# Altium PCB keyboard.PcbDoc
Units mm, origin at the board's own origin, x right, y up, seen from the top; angles counter-clockwise.
Board outline 80.01 x 69.34 mm, 2 copper layers (Top Layer, Bottom Layer); 38 components, 19 nets, 124 pads, 15 vias.
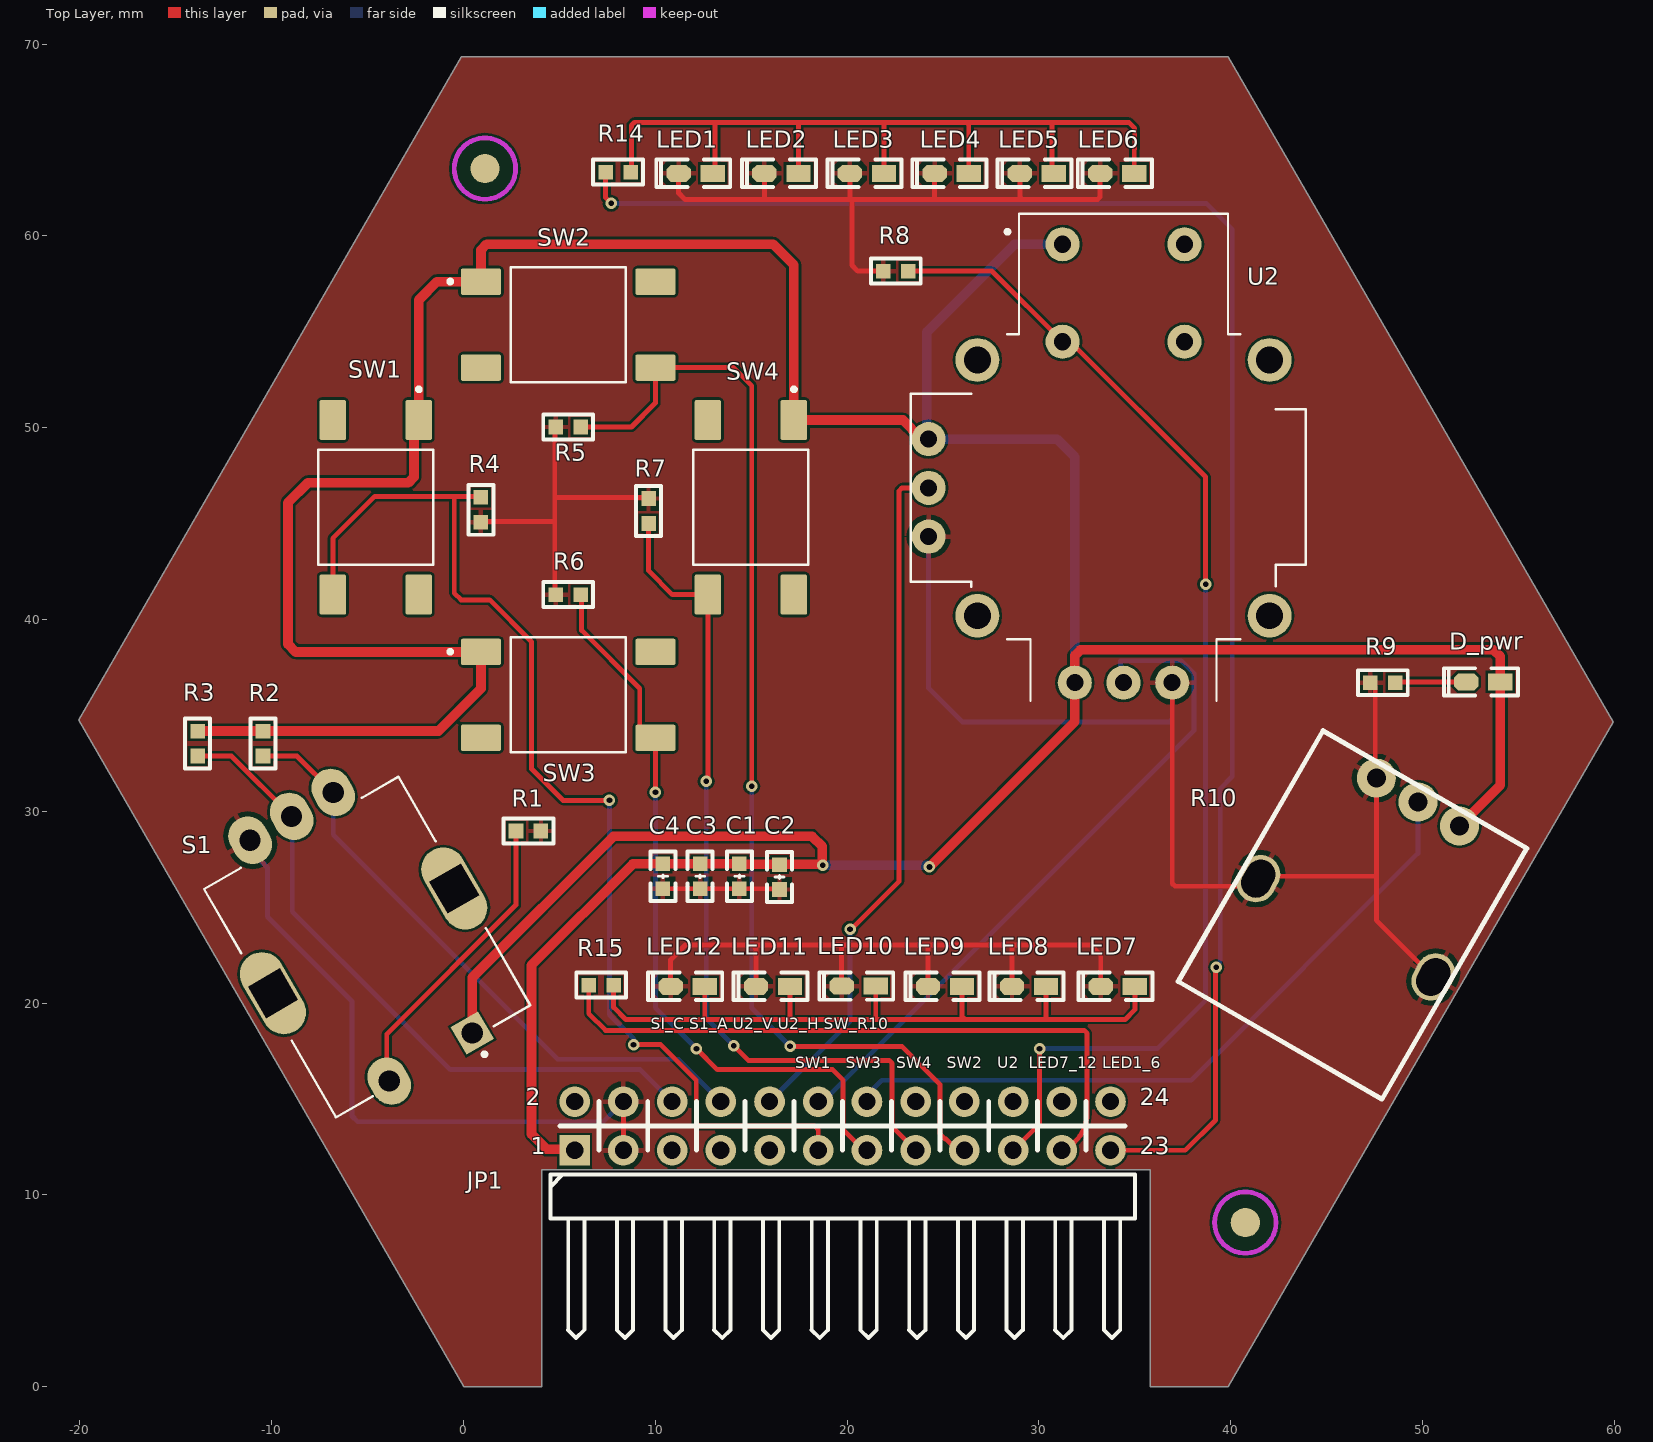
[diagram p0: Top Layer view]
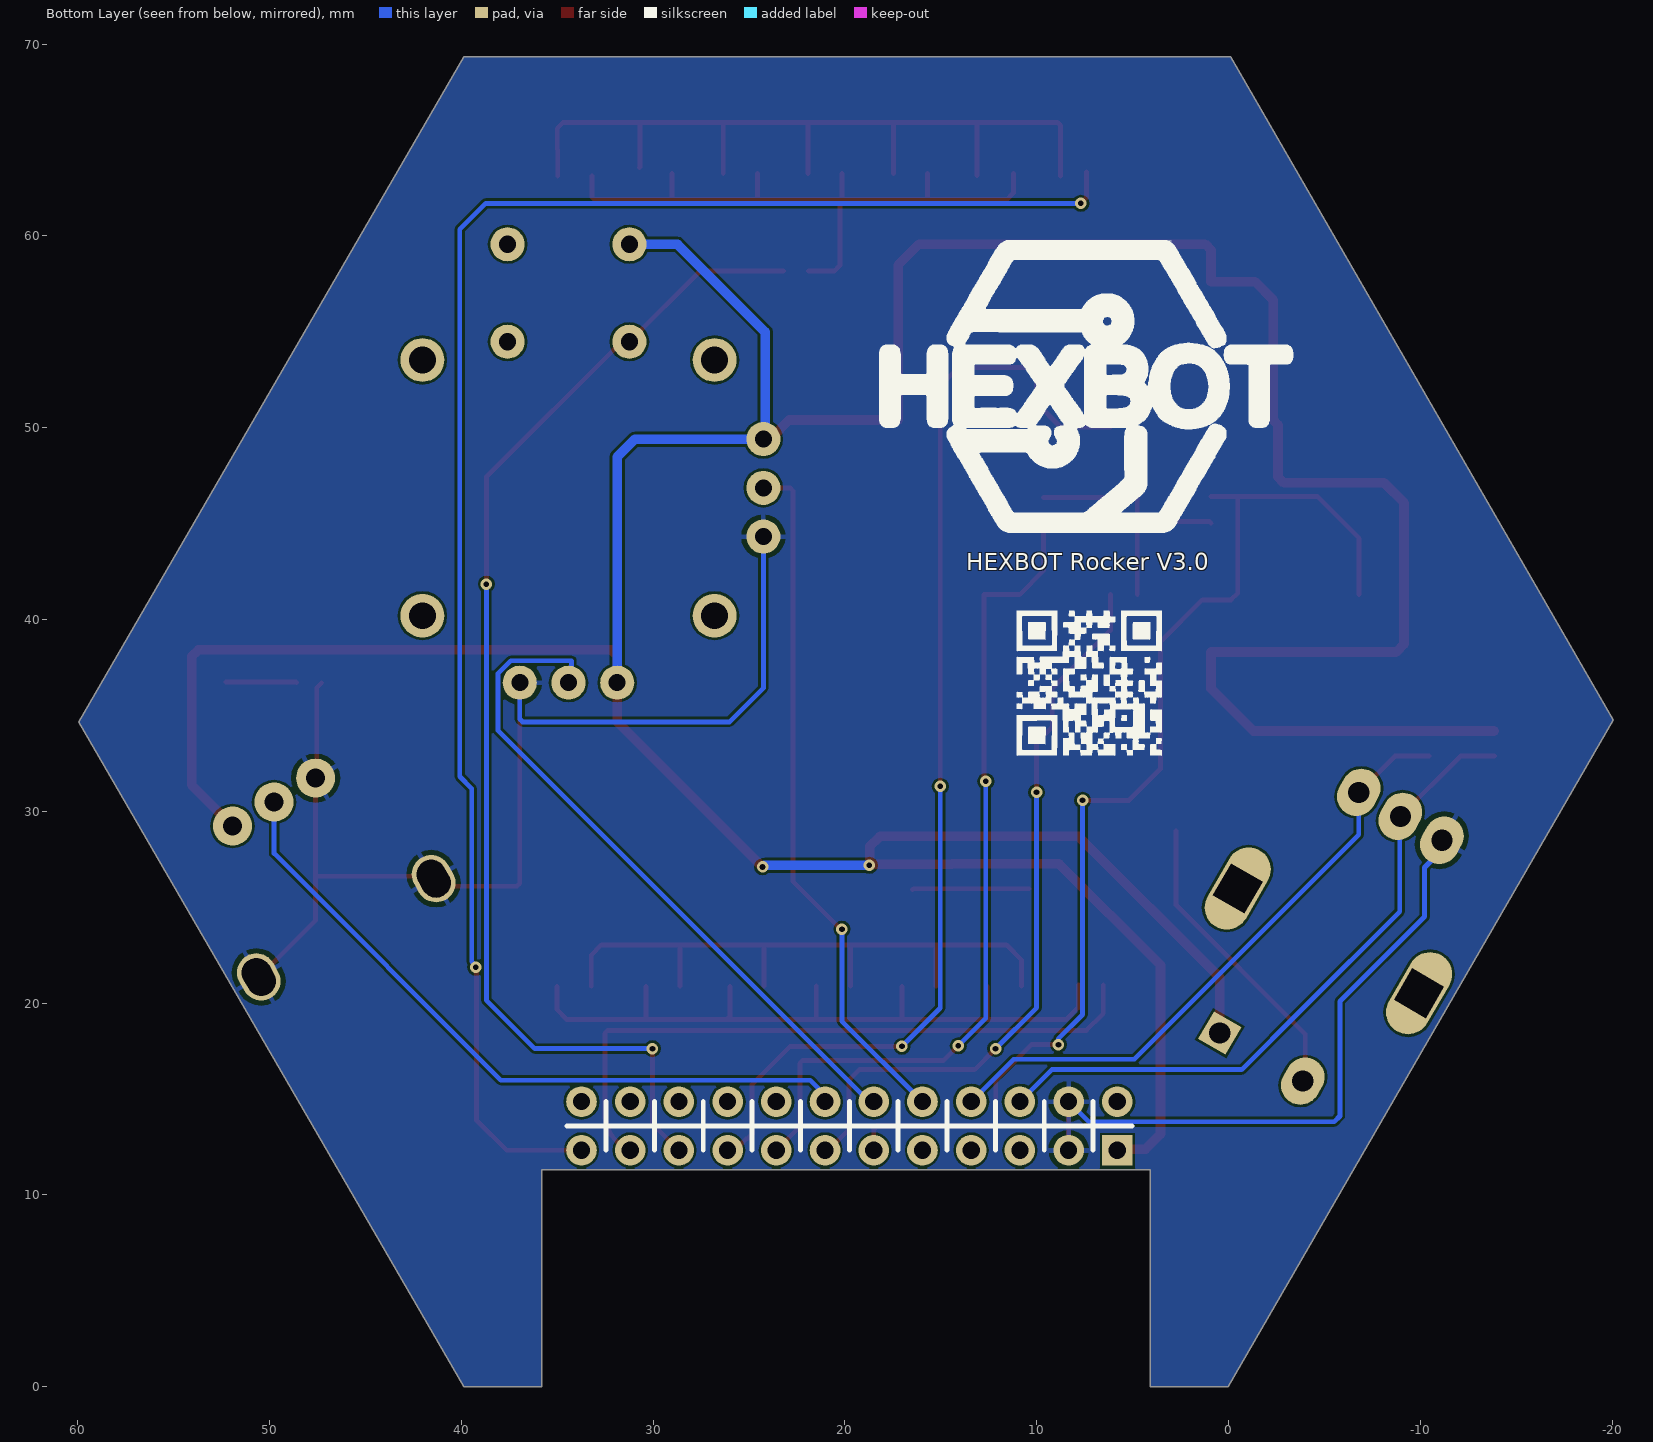
[diagram p1: Bottom Layer view, seen from below]

## Layer stack, top to bottom
Top Solder: solder mask 0.0102, Solder Resist, Dk 3.5
Top Layer: signal copper 0.0356
Dielectric 1: dielectric 0.32, FR-4, Dk 4.8
Bottom Layer: signal copper 0.0356
Bottom Solder: solder mask 0.0102, Solder Resist, Dk 3.5

## Board outline
-20.06,34.765 0.01,0 4.074,0 4.074,11.294 35.824,11.294 35.824,0 39.888,0 59.954,34.661 39.888,69.342 -0.11,69.342

## Design rules (kind name [scope] priority, off if disabled: settings)
Clearance [All] p1: gap=0.127 ignorepadtopadclearanceinfootprint=TRUE
HoleToHoleClearance [All] p1: gap=0 allowstackedmicrovias=TRUE
MinimumSolderMaskSliver [All] p1: minsoldermaskwidth=0
PolygonConnect [All] p1: connectstyle=Relief reliefconductorwidth=0.254 reliefentries=4 polygonreliefangle="90 Angle" airgapwidth=0.254
RoutingVias [All] p1: holewidth=0.711 width=1.27 viastyle="Through Hole" minholewidth=0.254 minwidth=0.508 maxholewidth=0.711 maxwidth=1.27
SilkToSilkClearance [All] p1: silktosilkclearance=0
SilkToSolderMaskClearance [IsPad] p1: minsilkscreentomaskgap=0 clearancetoexposedcopper=TRUE
SolderMaskExpansion [All] p1: expansion=0.102 istentingtop=FALSE
Width Width_1 [All] p1: maxlimit=0.508 minlimit=0.254 preferedwidth=0.254
Width vcc [InNet('3V3')] p2: maxlimit=0.508 minlimit=0.381 preferedwidth=0.508
26 further rules are at their usual default settings.

## Classes and differential pairs
component class keyboard: C1 C2 C3 C4 D_pwr JP1 LED1 LED2 LED3 LED4 LED5 LED6 LED7 LED8 LED9 LED10 LED11 LED12 R1 R2 R3 R4 R5 R6 R7 R8 R9 R10 R14 R15 S1 SW1 SW2 SW3 SW4 U2

## Components (designator, comment, footprint, x,y, rotation, side; value= is the part's Value field where it differs from the comment)
C1 "10uF" "C 0603_L" 14.39,26.61 r90 top
C2 "10uF" "C 0603_L" 16.48,26.57 r90 top
C3 "0.1uF" "C 0603_L" 12.34,26.61 r90 top
C4 "0.1uF" "C 0603_L" 10.4,26.61 r90 top
D_pwr "红色" "LED 0603R" 53.18,36.75 r180 top
JP1 "Header 2X11" HDR2.54-WI-2x12P 19.77,13.59 r0 top
LED1 "红色" "LED 0603R" 12.11,63.27 r180 top
LED2 "红色" "LED 0603R" 29.9,63.27 r180 top
LED3 "红色" "LED 0603R" 25.46,63.27 r180 top
LED4 "红色" "LED 0603R" 21.04,63.27 r180 top
LED5 "红色" "LED 0603R" 16.58,63.27 r180 top
LED6 "红色" "LED 0603R" 34.09,63.27 r180 top
LED7 "红色" "LED 0603R" 34.12,20.88 r180 top
LED8 "红色" "LED 0603R" 29.49,20.88 r180 top
LED9 "红色" "LED 0603R" 25.11,20.88 r180 top
LED10 "红色" "LED 0603R" 20.61,20.89 r180 top
LED11 "红色" "LED 0603R" 16.14,20.88 r180 top
LED12 "红色" "LED 0603R" 11.69,20.88 r180 top
MARK1 "Mark" Mark 1.12,63.51 r90 top
MARK2 "Mark" Mark 40.77,8.55 r90 top
R1 "1K" "R 0603_L" 3.39,28.97 r0 top
R2 "1K" "R 0603_L" -10.45,33.53 r270 top
R3 "1K" "R 0603_L" -13.86,33.53 r270 top
R4 "10k" "R 0603_L" 0.911,45.72 r90 top
R5 "10k" "R 0603_L" 5.461,50.038 r0 top
R6 "10k" "R 0603_L" 5.461,41.297 r0 top
R7 "10k" "R 0603_L" 9.652,45.655 r270 top
R8 "10k" "R 0603_L" 22.544,58.166 r0 top
R9 "1K" "R 0603_L" 47.941,36.703 r0 top
R10 "potentiometer" "PCBComponent_1 - duplicate" 49.77,30.48 r150 top
R14 "1K" "R 0603_L" 8.063,63.325 r180 top
R15 "1K" "R 0603_L" 7.18,20.935 r180 top
S1 "482020514001" SW_482020514001 -5.207,23.241 r210 top
SW1 "4-1437565-1" TE_FSM4JSMA -4.572,45.847 r270 top
SW2 "4-1437565-1" TE_FSM4JSMA 5.461,55.372 r0 top
SW3 "4-1437565-1" TE_FSM4JSMA 5.461,36.068 r0 top
SW4 "4-1437565-1" TE_FSM4JSMA 14.986,45.847 r270 top
U2 "COM-09032" XDCR_COM-09032 34.417,46.863 r0 top

## Footprints (in the part's own frame and the unit in brackets; to place one, negate y for a bottom-side part, rotate by r counter-clockwise, add the part's x,y. Pads: shape width x height; smd on the part's side, far side on the other; paste and mask are expansions set on the pad)
"C 0603_L" [mil] "无极性贴片电容                                       淘宝ID:黄晶宝石"
  rect 30x30 smd: 1(-25.59,0) 2(25.59,0)
  silkscreen extent -51,-26 51,26, body extent -31,-16 31,16, height 32
HDR2.54-WI-2x12P [mm] "双排弯脚排针，12x2脚  淘宝ID:黄晶宝石   店铺网址:https://shop463601444.taobao.com"
  rect 1.6x1.6 hole 0.9: 1(-13.97,-1.27)
  round 1.6 hole 0.9: 2(-13.97,1.27) 3(-11.43,-1.27) 4(-11.43,1.27) 5(-8.89,-1.27) 6(-8.89,1.27) 7(-6.35,-1.27) 8(-6.35,1.27) 9(-3.81,-1.27) 10(-3.81,1.27) 11(-1.27,-1.27) 12(-1.27,1.27) 13(1.27,-1.27) 14(1.27,1.27) 15(3.81,-1.27) 16(3.81,1.27) 17(6.35,-1.27) 18(6.35,1.27) 19(8.89,-1.27) 20(8.89,1.27) 21(11.43,-1.27) 22(11.43,1.27) 23(13.97,-1.27) 24(13.97,1.27)
  silkscreen extent -15.24,-11.06 15.24,1.27, body extent -15.24,-11.23 15.24,1.62, height 5.1
"LED 0603R" [mil] "红色0603LED                                           淘宝ID:黄晶宝石"
  rect 50x35 smd: 1(-35,0.26)
  oct 50x35 smd: 2(35,0.26)
  silkscreen extent -71,-28 81,28, body extent -31,-16 31,16, height 18
Mark [mil]
  round 60 smd mask+39.37: mark(0,0)
  Top Layer keep-out circle w10: c0,0 r62.99
"PCBComponent_1 - duplicate" [mil]
  round 80 hole 39.37: 1(-98.43,0) 2(0,0) 3(98.42,0)
  oval 80x100 hole 80 slot 60 at 0 deg: 4(-206.69,295.28) 4(205,300)
  silkscreen extent -241,-30 242,565
"R 0603_L" [mil] "1/10W贴片电阻                 淘宝ID:黄晶宝石"
  rect 30x30 smd: 1(-25.59,0) 2(25.59,0)
  silkscreen extent -51,-26 51,26, body extent -31,-16 32,16, height 16
SW_482020514001 [mm]
  rect 1.65x1.65 hole 1.1: 1(-2.5,7)
  oval 2.032x2.54 hole 1.1: 2(2.5,7) A(-2.5,-7.5) B(2.5,-7.5) C(0,-7.5)
  oval 2.3x4.6 hole 1.9 square: S1(5.461,0) S2(-5.461,0)
  silkscreen extent -5.85,-6.5 5.85,8.37
TE_FSM4JSMA [mm]
  rrect15% 2.1x1.38 smd: 1(-4.55,2.24) 2(4.55,2.24) 3(-4.55,-2.24) 4(4.55,-2.24)
  silkscreen extent -6.25,-3 3,3
XDCR_COM-09032 [mil]
  round 70 hole 35.43: B1A(-125,500) B1B(125,500) B2A(-125,300) B2B(125,300)
  round 70 hole 35: H1(-100,-400) H2(0,-400) H3(100,-400) V1(-400,100) V2(-400,0) V3(-400,-100)
  round 90 hole 55: S1(-300,262.5) S2(-300,-262.5) S3(300,-262.5) S4(300,262.5)
  silkscreen extent -437,-437 374,563

## Part data
C1 C2 C3 C4: library part C, "贴片电容", BOM名称=无极性贴片电容, 唯一出售店铺网址=https://shop463601444.taobao.com, 淘宝ID="封装库来自淘宝 ID：黄晶宝石", 联系售后，技术支持=https://shop463601444.taobao.com
D_pwr LED1 LED2 LED3 LED4 LED5 LED6 LED7 LED8 LED9 LED10 LED11 LED12: library part LED-SMD, "贴片LED", BOM名称=贴片LED, 学习资源=https://shop463601444.taobao.com, 版权归属="封装库来自淘宝 ID：黄晶宝石"
JP1: library part "Header 12X2", "12*2P接插件", BOM名称=12*2P接插件, 学习资源=https://shop463601444.taobao.com, 版权归属="封装库来自淘宝卖家 ID：黄晶宝石"
R1 R2 R3 R4 R5 R6 R7 R8 R9 R14 R15: library part R, "贴片电阻", BOM名称=贴片电阻, 封装库来自淘宝卖家 ID：黄晶宝石=其他店铺购入均为盗版，不享受售后技术支持服务，请立即申请退款, 版权归属="来自淘宝 ID：黄晶宝石", 联系售后=https://shop463601444.taobao.com
R10: library part R?
S1: "Rotary Encoder Mechanical 20 Quadrature _Incremental_ Vertical", Package=None, Availability=Unavailable, MF="Wurth Electronics", MP=482020514001, Price=None, SnapEDA_Link=https://www.snapeda.com/parts/482020514001/Wurth%20Electronics%20Inc./view-part/3661073/?ref=snap
SW1 SW2 SW3 SW4: library part FSM4JSMA, "Tactile Switch SPST-NO Top Actuated Surface Mount", Contact_Current_Rating="50 mA", Package=None, Availability=Unavailable, Configuration_Pole-Throw="Single Pole - Single Throw", EU_RoHS_Compliance=Compliant, MF="TE Connectivity", MP=FSM4JSMA, Price=None, SnapEDA_Link=https://www.snapeda.com/parts/FSM4JSMA/TE%20Connectivity%20ALCOSWITCH%20Switches/view-part/543632/?ref=snap, TE_purchase_URL=https://www.te.com/usa-en/product-4-1437565-1.html?te_bu=Cor&te_type=disp&te_campaign=seda_glo_cor-seda-global-disp-prtnr-fy19-seda-model-bom-cta_sma-317_1&elqCampaignId=32493
U2: "Joystick, 2 - Axis Analog _Resistive_ Output", Package="SparkFun Electronics", Availability=Unavailable, MF="SparkFun Electronics", MP=COM-09032, Price=None, SnapEDA_Link=https://www.snapeda.com/parts/COM-09032/SparkFun%20Electronics/view-part/888157/?ref=snap

## Via types
v1: diameter 0.6, hole 0.3, Top Layer to Bottom Layer, tented both sides, 15 vias

## Nets (pads, with @x,y where several pads share a name; then routed paths per layer and width w, separated by ;. In a path a pad name is that pad's centre, name@x,y a point inside that pad or via, vN(x,y) a via of type N, cw(c..) or ccw(c..) an arc to the next point about the centre after c; other vN are vias at no path point)
3V3: C1.2 C2.2 C3.2 C4.2 D_pwr.1 JP1.1 R2.1 R3.1 R10.1 S1.1 SW1.1 SW2.1 SW3.1 SW4.1 U2.B1A U2.H1 U2.V1 | length 229.8
  Top Layer w0.508: R3.1 R2.1 -1.307,34.18 0.911,36.398 SW3.1 -8.748,38.308 -9.15,38.71 -9.15,46.09 -8.11,47.13 -2.878,47.13 -2.58,47.428 -2.58,50.149 SW1.1 -2.332,56.668 -1.388,57.612 SW2.1 0.911,59.272 1.209,59.569 16.137,59.569 17.226,58.48 SW4.1 22.919,50.397 23.816,49.5 24.16,49.5 U2.V1 ; S1.1 0.458,21.334 7.814,28.69 18.182,28.69 18.712,28.16 18.712,27.187 18.705,27.18 18.645,27.24 14.41,27.24 C1.2 C3.2 C4.2 8.835,27.26 3.55,21.975 3.55,13.164 4.334,12.38 5.74,12.38 JP1.1 ; v1(24.298,27.099) 31.877,34.678 U2.H1 31.877,38.122 32.175,38.42 53.72,38.42 54.069,38.071 D_pwr.1 54.069,31.364 R10.1
  Bottom Layer w0.508: v1(18.73,27.18) 24.191,27.18 24.273,27.099 v1(24.298,27.099) ; U2.V1@24.16,49.5 24.16,55 28.723,59.563 U2.B1A ; U2.V1 30.957,49.403 31.877,48.483 U2.H1
5V: JP1.2
GND: C1.1 C2.1 C3.1 C4.1 JP1.3 JP1.4 LED1.2 LED2.2 LED3.2 LED4.2 LED5.2 LED6.2 LED7.2 LED8.2 LED9.2 LED10.2 LED11.2 LED12.2 R1.2 R4.1 R5.1 R6.1 R7.1 R8.1 R9.1 R10.3 R10.4 S1.B U2.H3 U2.V3 | length 188.7
  Top Layer w0.254: R4.1@0.911,45.02 1.001,45.11 4.761,45.11 ; R6.1@4.761,41.297 4.761,45.11 ; R5.1@4.761,50.038 4.761,46.355 ; JP1.3 JP1.4 ; R7.1@9.652,46.355 4.761,46.355 ; C4.1 C3.1 C1.1 16.44,25.96 C2.1 ; LED12.2 10.801,22.251 11.58,23.03 15.06,23.03 ; LED1.2@11.221,63.257 11.221,62.239 11.57,61.89 15.72,61.89 ; LED11.2 15.251,22.839 15.06,23.03 ; LED5.2 15.691,61.919 15.72,61.89 ; LED10.2 19.721,22.969 19.66,23.03 ; LED4.2 20.151,61.999 20.26,61.89 ; R8.1 20.564,58.166 20.26,58.47 20.26,61.89 ; LED9.2 24.221,22.964 24.287,23.03 ; LED3.2 24.571,61.941 24.52,61.89 ; LED8.2 28.601,22.941 28.69,23.03 ; LED2.2 29.011,62.049 29.17,61.89 ; LED6.2@33.201,63.123 33.201,62.039 33.052,61.89 29.17,61.89 ; LED7.2 33.231,22.499 32.7,23.03 28.69,23.03 ; U2.H3 36.957,26.235 37.106,26.086 41.052,26.086 41.578,26.611 47.605,26.611 ; R9.1 47.545,36.449 47.545,31.79 R10.3 47.605,26.611 ; R10.4@50.567,21.36 50.208,21.718 47.605,24.321 47.605,26.611 ; 4.761,45.11 4.761,46.355 ; 15.06,23.03 19.66,23.03 ; 15.72,61.89 20.26,61.89 ; 19.66,23.03 24.287,23.03 ; 20.26,61.89 24.52,61.89 ; 24.287,23.03 28.69,23.03 ; 24.52,61.89 29.17,61.89
  Bottom Layer w0.254: S1.B -11.122,27.968 -10.22,27.066 -10.22,24.5 -5.81,20.09 -5.81,14.11 -5.506,13.806 7.286,13.806 JP1.4 ; U2.V3 24.257,36.423 26.019,34.661 36.808,34.661 36.957,34.81 U2.H3
LED1_6: JP1.23 R14.2 | length 87.6
  Top Layer w0.254: R14.2 7.413,61.987 v1(7.7,61.7) ; JP1.23 37.64,12.32 39.22,13.9 39.22,21.827 v1(39.254,21.861)
  Bottom Layer w0.254: v1(7.7,61.7) 38.73,61.7 40.09,60.34 40.09,31.81 39.46,31.18 39.46,22.161 39.254,21.955 v1(39.254,21.861)
LED7_12: JP1.21 R15.2 | length 34.6
  Top Layer w0.254: R15.2 6.53,19.451 7.411,18.57 32.371,18.57 32.52,18.421 32.52,14.255 cw(c30.442,14.255) JP1.21
NetD_pwr_2: D_pwr.2 R9.2 | length 3.7
  Top Layer w0.254: R9.2 48.631,36.743 D_pwr.2
NetLED2_1: LED1.1 LED2.1 LED3.1 LED4.1 LED5.1 LED6.1 R14.1 | length 44.8
  Top Layer w0.254: R14.1@8.763,63.119 8.763,65.771 8.912,65.92 13.12,65.92 ; LED1.1@13.12,63.16 13.12,65.92 ; LED5.1 17.469,65.859 17.53,65.92 ; LED4.1 21.929,65.885 21.894,65.92 ; LED3.1 26.349,65.809 26.238,65.92 ; LED2.1@30.73,63.555 30.724,63.555 30.698,63.581 30.698,65.803 30.581,65.92 ; LED6.1@34.979,63.123 34.979,64.515 35.005,64.541 35.005,65.615 34.7,65.92 30.581,65.92 ; 13.12,65.92 17.53,65.92 ; 17.53,65.92 21.894,65.92 ; 21.894,65.92 26.238,65.92 ; 26.238,65.92 30.581,65.92
NetLED7_1: LED7.1 LED8.1 LED9.1 LED10.1 LED11.1 LED12.1 R15.1 | length 38.9
  Top Layer w0.254: R15.1 7.83,19.77 8.46,19.14 12.68,19.14 ; LED12.1 12.579,19.241 12.68,19.14 ; LED11.1 17.029,19.269 16.9,19.14 ; LED10.1 21.499,19.166 21.525,19.14 ; LED9.1 25.999,19.291 26.15,19.14 ; LED8.1 30.379,19.149 30.37,19.14 ; LED7.1 35.009,19.649 34.5,19.14 30.37,19.14 ; 12.68,19.14 16.9,19.14 ; 16.9,19.14 21.525,19.14 ; 21.525,19.14 26.15,19.14 ; 26.15,19.14 30.37,19.14
NetR1_1: R1.1 S1.2 | length 15.9
  Top Layer w0.254: S1.2 -3.999,16.056 -3.999,18.381 2.74,25.12 R1.1
S1_A: JP1.8 R2.2 S1.A | length 32.6
  Top Layer w0.254: R2.2 -8.686,32.88 S1.A
  Bottom Layer w0.254: S1.A -6.792,28.772 4.91,17.07 11.21,17.07 JP1.8
S1_C: JP1.6 R3.2 S1.C | length 35.1
  Top Layer w0.254: R3.2 -12.101,32.88 S1.C
  Bottom Layer w0.254: S1.C -8.93,29.709 -8.93,24.77 -3.83,19.67 -0.69,16.53 9.21,16.53 JP1.6
SW_Down: JP1.13 R6.2 SW3.4 | length 38.6
  Top Layer w0.254: R6.2@6.161,41.297 6.161,39.429 9.192,36.398 9.192,34.391 9.755,33.828 SW3.4 v1(10.011,30.986) ; v1(12.15,17.62) 13.24,16.53 19.247,16.53 19.8,15.977 19.8,13.4 JP1.13@20.75,12.45
  Bottom Layer w0.254: v1(10.011,30.986) 10.011,19.759 v1(12.15,17.62)
SW_Left: JP1.11 R4.2 SW1.4 | length 60.2
  Top Layer w0.254: SW1.4 -6.812,44.228 -4.62,46.42 -0.478,46.42 ; R4.2@0.911,46.42 -0.478,46.42 ; v1(7.61,30.57) 5.19,30.57 3.55,32.21 3.55,38.836 1.366,41.02 -0.12,41.02 -0.478,41.378 -0.478,46.42 ; v1(8.87,17.83) 10.28,17.83 12.14,15.97 12.14,13.739 12.289,13.59 18.31,13.59 18.5,13.4 JP1.11
  Bottom Layer w0.254: v1(7.61,30.57) 7.61,19.4 8.87,18.14 v1(8.87,17.83)
SW_R10: JP1.14 R10.2 | length 37
  Bottom Layer w0.254: JP1.14 21.04,15.19 21.82,15.97 37.94,15.97 49.77,27.8 R10.2
SW_Right: JP1.15 R7.2 SW4.4 | length 44
  Top Layer w0.254: R7.2@9.652,44.955 9.652,42.538 10.893,41.297 SW4.4 12.746,31.646 v1(12.658,31.558) v1@12.57,31.47 ; v1(14.09,17.77) 14.85,17.01 22.201,17.01 22.35,16.861 22.35,13.55 JP1.15
  Bottom Layer w0.254: v1(12.658,31.558) 12.658,19.202 v1(14.09,17.77)
SW_U2: JP1.19 R8.2 U2.B2A | length 62.8
  Top Layer w0.254: R8.2 27.559,58.166 U2.B2A 31.647,54.483 38.7,47.43 v1(38.7,41.84) ; JP1.19 30.04,13.7 v1(30.04,17.62)
  Bottom Layer w0.254: v1(30.04,17.62) 36.17,17.62 38.7,20.15 38.7,25.572 v1(38.7,41.84)
SW_UP: JP1.17 R5.2 SW2.4 | length 59.7
  Top Layer w0.254: R5.2@6.161,50.038 8.763,50.038 10.011,51.286 SW2.4 14.088,53.132 15.03,52.19 v1(15.03,31.3) ; v1(17.029,17.74) 22.86,17.74 24.84,15.76 24.84,13.19 25.13,12.9 25.175,12.9 25.756,12.32 JP1.17
  Bottom Layer w0.254: v1(15.03,31.3) 15.03,19.739 v1(17.029,17.74)
U2_H: JP1.12 U2.H2 | length 35.9
  Bottom Layer w0.254: JP1.12 18.741,14.86 38.1,34.219 38.1,37.176 37.43,37.846 34.26,37.846 34.26,36.86 U2.H2
U2_V: JP1.10 U2.V2 | length 36.3
  Top Layer w0.254: v1@20.16,23.78 20.195,23.815 22.72,26.34 22.72,46.714 22.869,46.863 U2.V2
  Bottom Layer w0.254: JP1.10 20.16,19.06 v1(20.16,23.85)
pads on no net: JP1.5 JP1.7 JP1.9 JP1.16 JP1.18 JP1.20 JP1.22 JP1.24 MARK1.mark MARK2.mark S1.S1 S1.S2 SW1.2 SW1.3 SW2.2 SW2.3 SW3.2 SW3.3 SW4.2 SW4.3 U2.B1B U2.B2B U2.S1 U2.S2 U2.S3 U2.S4

## Polygon pours and split planes (outlines as drawn)
GND on Top Layer "Top Layer-No Net" (solid, remove dead copper, pour order 0): -20.06,34.765 0.01,0 4.074,0 4.074,11.294 35.824,11.294 35.824,0 39.888,0 59.954,34.661 39.888,69.342 -0.11,69.342
GND on Bottom Layer "Top Layer-No Net1" (solid, pour order 1): -20.06,34.765 0.01,0 4.074,0 4.074,11.294 35.824,11.294 35.824,0 39.888,0 59.954,34.661 39.888,69.342 -0.11,69.342

## Silkscreen, mask and mechanical layers (free items; w line width, h text height)
Top Overlay:
  text "SI_C S1_A U2_V U2_H SW_R10" at 9.772,18.43 h1.02
  text "SW1   SW3   SW4   SW2   U2  LED7_12 LED1_6" at 17.291,16.4 h1.02
Bottom Overlay:
  drawing of 2418 lines, arcs and shapes, not listed
  text "HEXBOT Rocker V3.0" at 13.68,42.268 h1.5
Mechanical 1:
  the board outline again, w0.254

## Text inside footprints (layer, text, board x,y; h text height)
JP1: Top Overlay "1" at 3.514,11.812 h1.52; Top Overlay "2" at 3.26,14.352 h1.52; Top Overlay "23" at 35.264,11.812 h1.52; Top Overlay "24" at 35.264,14.352 h1.52